# Altium PCB LED_PCB.PcbDoc (part 2 of 4)
Units mil, origin at the board's own origin, x right, y up, seen from the top; angles counter-clockwise.
Board outline 8000 x 4000 mil, 2 copper layers (Top Layer, Bottom Layer); 187 components, 303 nets, 1415 pads, 387 vias.
Unrouted connection lines stored in the file: 1.
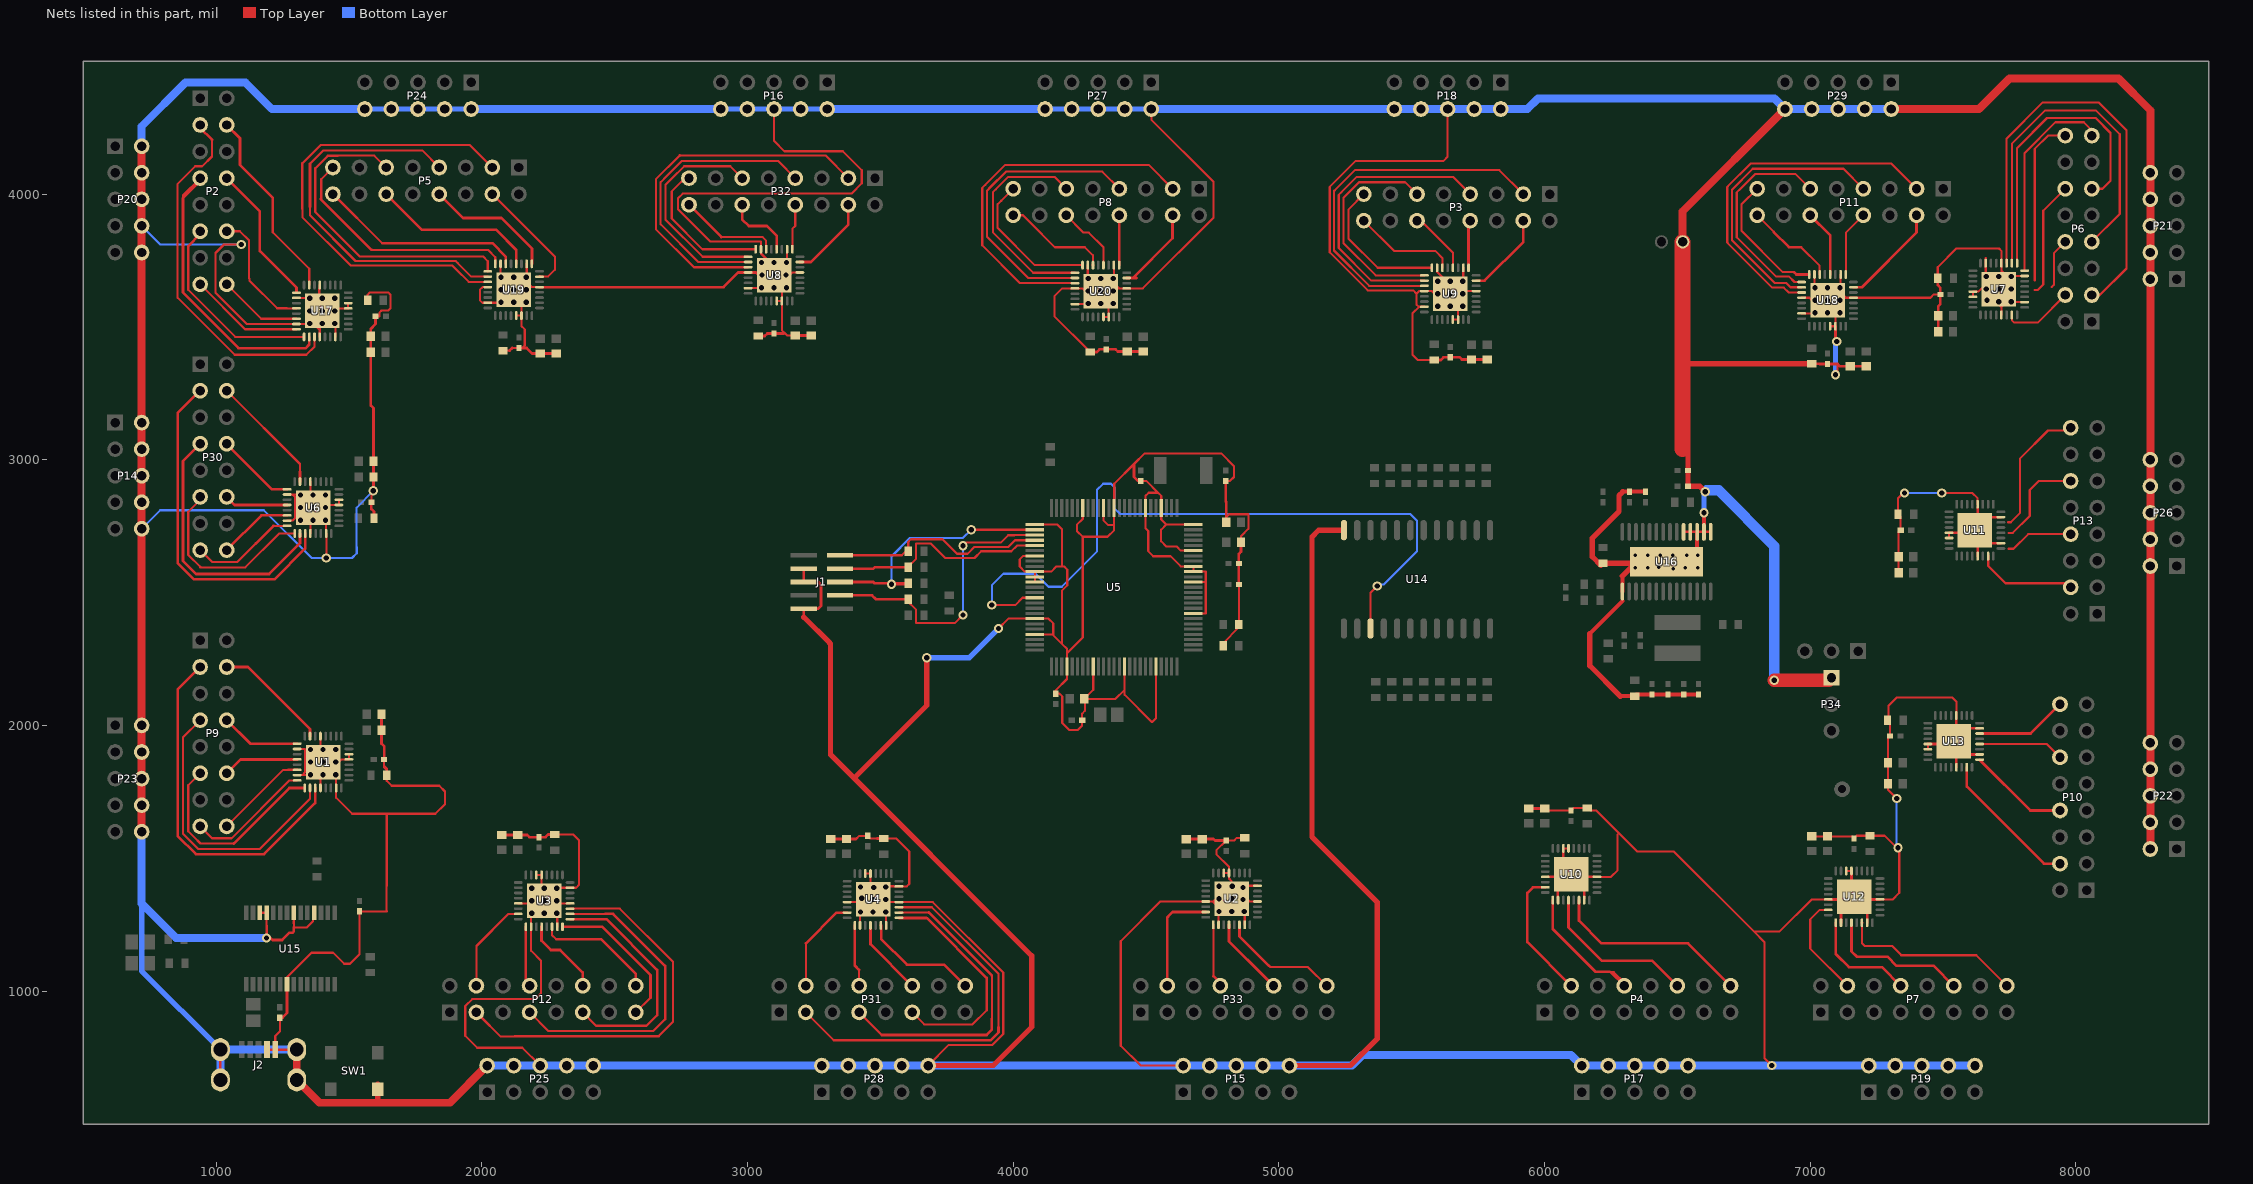
[diagram p2: the nets of this part, all layers, seen from the top]

## Via types
v1: diameter 35, hole 20, Top Layer to Bottom Layer, 371 vias
v2: diameter 25.98, hole 12.99, Top Layer to Bottom Layer, tented top, 12 vias
v3: diameter 89, hole 89, Top Layer to Bottom Layer, 4 vias

## Nets (pads, with @x,y where several pads share a name; then routed paths per layer and width w, separated by ;. In a path a pad name is that pad's centre, name@x,y a point inside that pad or via, vN(x,y) a via of type N, cw(c..) or ccw(c..) an arc to the next point about the centre after c; other vN are vias at no path point) (continued)
GND: C1.1 C2.1 C3.1 C4.1 C5.1 C6.1 C7.1 C8.1 C9.1 C10.1 C11.1 C12.1 C13.1 C14.1 C15.1 C16.1 C17.1 C18.1 C19.1 C20.1 C21.1 C22.1 C23.1 C24.1 C25.1 C26.1 C27.1 C28.1 C29.1 C30.1 C31.1 C32.1 C33.1 C34.1 C35.1 C36.1 C37.1 C38.1 C39.1 C40.1 C41.1 C42.1 C43.1 C44.1 C45.1 C46.1 C47.1 C48.2 C49.2 C50.2 C51.2 C54.1 C55.1 C56.1 C59.1 C60.1 C61.1 C62.1 C63.1 C64.1 C65.1 C66.1 C67.1 C68.1 C69.1 C70.1 C71.1 J1.3 J1.5 J1.9 J2.4 J2.5 J2.6 J2.7 J2.8 J2.9 J3.2 P14.6 P14.7 P14.8 P14.9 P14.10 P15.6 P15.7 P15.8 P15.9 P15.10 P16.6 P16.7 P16.8 P16.9 P16.10 P17.6 P17.7 P17.8 P17.9 P17.10 P18.6 P18.7 P18.8 P18.9 P18.10 P19.6 P19.7 P19.8 P19.9 P19.10 P20.6 P20.7 P20.8 P20.9 P20.10 P21.6 P21.7 P21.8 P21.9 P21.10 P22.6 P22.7 P22.8 P22.9 P22.10 P23.6 P23.7 P23.8 P23.9 P23.10 P24.6 P24.7 P24.8 P24.9 P24.10 P25.6 P25.7 P25.8 P25.9 P25.10 P26.6 P26.7 P26.8 P26.9 P26.10 P27.6 P27.7 P27.8 P27.9 P27.10 P28.6 P28.7 P28.8 P28.9 P28.10 P29.6 P29.7 P29.8 P29.9 P29.10 P34.1 R1.1 R2.1 R3.1 R4.1 R10.1 R11.1 R13.1 R14.1 R15.1 R16.1 R17.1 R18.1 R19.1 R20.1 R42.2 R47.1 R48.1 R49.1 R50.1 R51.1 SW1.4 U1.5 U1.10 U1.15 U1.20 U1.23 U1.29 U1.30 U1.33 U2.5 U2.10 U2.15 U2.20 U2.23 U2.29 U2.30 U2.33 U3.5 U3.10 U3.15 U3.20 U3.23 U3.29 U3.30 U3.33 U4.5 U4.10 U4.15 U4.20 U4.23 U4.29 U4.30 U4.33 U5.4 U5.9 U5.15 U5.21 U5.33 U5.39 U5.41 U5.42 U5.45 U5.50 U5.54 U5.57 U5.63 U5.65 U5.69 U5.76 U5.82 U5.85 U5.86 U5.87 U5.94 U5.97 U6.5 U6.10 U6.15 U6.20 U6.23 U6.29 U6.30 U6.33 U7.5 U7.10 U7.15 U7.20 U7.23 U7.29 U7.30 U7.33 U8.5 U8.10 U8.15 U8.20 U8.23 U8.29 U8.30 U8.33 U9.5 U9.10 U9.15 U9.20 U9.23 U9.29 U9.30 U9.33 U10.5 U10.10 U10.15 U10.20 U10.29 U10.30 U10.33 U11.5 U11.10 U11.15 U11.20 U11.29 U11.30 U11.33 U12.5 U12.10 U12.15 U12.20 U12.29 U12.30 U12.33 U13.5 U13.10 U13.15 U13.20 U13.29 U13.30 U13.33 U14.12 U15.7 U15.18 U15.21 U15.25 U15.26 U16.1 U16.15 U16.16 U16.17 U16.18 U16.19 U16.29 U17.5 U17.10 U17.15 U17.20 U17.23 U17.29 U17.30 U17.33 U18.5 U18.10 U18.15 U18.20 U18.23 U18.29 U18.30 U18.33 U19.5 U19.10 U19.15 U19.20 U19.23 U19.29 U19.30 U19.33 U20.5 U20.10 U20.15 U20.20 U20.23 U20.29 U20.30 U20.33 | length 73037.5
  Top Layer w8: v1(1095,3810) 1030,3810 998,3778 998,3628 1115.21,3510.79 U17.15@1302.56,3510.79 1367.37,3510.79 1390.16,3488 ; 1190.43,1245.57 U15.25@1190.43,1294.45 ; J2.5@1222.99,780 1222.99,831 1240,848.01 C47.1@1240,900.32 ; U15.7@1267.2,1025.55 1267.2,1052.56 1359.14,1144.5 1440.5,1144.5 1482,1103 1504,1103 1540,1139 C46.1@1540,1300.32 1642,1300.32 1642.28,1484.78 ; U6.15@1267.56,2770.79 1288,2770.79 1297,2779.79 1297,2860.21 1288,2869.21 ; U6.10@1267.56,2869.21 1288,2869.21 ; 1276.62,1220 1288,1220 ; 1292.8,1255.48 1292.8,1240 1342.13,1240 1364.64,1262.51 1364.64,1271.64 1369.57,1276.57 U15.18@1369.57,1294.45 ; 1292.8,1263.2 U15.21@1292.8,1294.45 ; U17.10@1302.56,3609.21 U17.33@1360.95,3609.21 ; U1.15@1305.32,1813.03 1324.03,1813.03 ; U1.10@1305.32,1911.46 1335,1911.46 1335,1824 1324.03,1813.03 ; U6.20@1355.16,2722.56 1355.16,2810.16 v1(1365,2820) 1355.16,2829.84 U6.33@1355.16,2873 ; U6.5@1355.16,2917.44 U6.33@1355.16,2873 ; U17.20@1390.16,3462.56 1390.16,3488 ; U17.5@1390.16,3657.44 1386.37,3609.21 U17.33@1360.95,3609.21 ; U1.20@1392.91,1764.8 1392.91,1796.12 ; U1.5@1392.91,1959.68 1392.91,1872.09 v1(1402.76,1862.24) ; v1(1400,3560) U17.33@1390.16,3550.16 ; v1(1415,2630) 1415,2721.77 U6.23@1414.21,2722.56 1414.21,2818.05 1426,2829.84 U6.29@1462.44,2829.84 U6.30@1462.44,2849.53 ; U17.23@1449.21,3462.56 1449.21,3558.05 1461,3569.84 U17.29@1497,3569.84 ; U17.29@1497.44,3569.84 U17.29@1497,3569.84 ; U17.30@1497.44,3589.53 1497,3589.53 U17.29@1497,3569.84 ; U1.30@1500.2,1891.77 U1.29@1500.2,1872.09 1471,1872.09 1461.16,1862.24 v1(1450,1862.24) v1(1402.76,1862.24) ; R49.1@1570.47,3600 1570.47,3621.28 1579.2,3630 1648,3630 1656.37,3621.63 1656.37,3570.22 1648,3561.84 1645.53,3561.84 1622.9,3561.84 1615.88,3554.81 1615.88,3549 ; C25.1@1584.68,2840 1584.68,2875.68 v1(1592,2883) ; C63.1@1600.32,3540 1615.87,3540 1615.87,3549 ; C4.1@1632.44,1872.24 1632.44,1846.84 1632.44,1841.84 1642.28,1832 R2.1@1642.28,1812.24 1642.28,1792 1661.15,1773.14 1840,1773.14 1861.5,1751.64 1861.5,1704 1825,1667.5 1642.28,1667.5 1512.47,1667.5 1451.97,1728 U1.23@1451.97,1764.8 1451.97,1813.03 v1(1402.76,1862.24) ; U19.20@2022.56,3649.84 2002.84,3649.84 1993,3640 1993,3600 2002.21,3590.79 U19.23@2022.56,3590.79 2070.79,3590.79 v1(2072.76,3592.76) ; U19.15@2070.79,3737.44 2070.79,3691.05 2112,3649.84 2120,3649.84 U19.33@2129.84,3649.84 ; R50.1@2080,3410.47 2104,3410.47 2113.84,3420.32 2114.84,3420.32 C66.1@2140,3420.32 2152,3420.32 2162,3430.32 2162,3490.53 2149.53,3503 U19.30@2149.53,3542.56 ; U19.29@2129.84,3542.56 U19.30@2149.53,3542.56 ; U3.5@2137.56,1330.16 2177.91,1330.16 2178,1330.16 2185.79,1322.37 U3.10@2185.79,1242.56 2185.79,1152.21 2223,1115 2223,992 2201,970 1964,970 1938,944 1938,832 1983,787 2153,787 P25.8@2220,720 ; U19.10@2169.21,3737.44 2169.21,3670 2189.37,3649.84 ; U3.30@2205.47,1437.44 U3.29@2225.16,1437.44 2225.16,1349.84 v1(2235,1340) v1(2282.24,1292.76) 2284.21,1290.79 U3.15@2284.21,1242.56 ; U19.5@2217.44,3649.84 2189.37,3649.84 ; R3.1@2275,1589.53 2344.47,1589.53 2366,1568 2366,1400 2355.21,1389.21 U3.23@2332.44,1389.21 2312,1389.21 ; U3.33@2295,1330 2312.16,1330 2312,1330.16 U3.20@2332.44,1330.16 ; U8.23@3002.56,3645.79 3050.79,3645.79 v1(3100,3695) ; 3031,3704.84 3040.84,3695 U8.33@3052.76,3695 ; v1(3055,3695) U8.33@3055,3710 ; U8.33@3055,3697.24 U8.33@3052.76,3695 ; P16.8@3100,4320 3100,4200 3139,4161 3359,4161 3430,4090 3430,4040 3391.53,4001.53 2756,4001.53 2738.47,3984 2738.47,3942.8 2860.1,3821.17 3050.79,3821.17 U8.15@3050.79,3792.44 3050.79,3776.38 3100,3727.17 v1(3100,3695) ; U8.29@3109.84,3597.56 U8.30@3129.53,3597.56 ; 3136,3475.32 3142.21,3475.32 ; v1(3147.24,3742.24) 3149.21,3744.21 U8.10@3149.21,3792.44 ; C26.1@3180,3467.44 3150.09,3467.44 3142.21,3475.32 ; U8.5@3197.44,3704.84 3168.9,3704.84 3147.24,3683.19 U8.33@3129.53,3665.47 ; J1.3@3211.89,2590.39 J1.3@3244.39,2590.39 ; 3310,2309.67 3312.76,2306.92 ; U4.5@3375.32,1335.16 3425.51,1335.16 3462.91,1335.16 v1(3472.76,1345) ; 3408.76,1572.56 3420.57,1584.37 C12.1@3452.76,1584.37 3462.6,1574.53 3487.6,1574.53 ; U4.10@3423.54,1247.56 U4.33@3423.54,1312 ; U4.30@3443.23,1442.44 U4.29@3462.91,1442.44 3462.91,1354.84 v1(3472.76,1345) ; U4.33@3456,1297 3504.97,1297 3521.97,1280 U4.15@3521.97,1247.56 ; R4.1@3512.76,1574.53 3560.47,1574.53 3609.15,1525.85 3609.15,1403.36 3600,1394.21 U4.23@3570.2,1394.21 3551.21,1394.21 3552,1395 U4.33@3535,1395 ; v1@3675,2252.24 v1(3675,2255) ; P28.10@3680,720 3758,798 3922.04,798 3962.66,838.62 3962.66,1069.97 3697.47,1335.16 U4.20@3570.2,1335.16 3520,1335.16 3482.6,1335.16 v1(3472.76,1345) ; v1(3945,2365) 3981.89,2401.89 U5.94@4081.77,2401.89 4133.11,2401.89 4151,2384 4151,2340 ; U5.97@4061.11,2342.38 4061.11,2342.83 U5.97@4081.77,2342.83 4148.17,2342.83 4151,2340 ; U5.87@4081.77,2539.69 U5.86@4081.77,2559.37 U5.85@4081.77,2579.06 ; U5.82@4081.77,2638.11 4038.11,2638.11 4025,2625 4025,2598.19 4044.13,2579.06 U5.85@4081.77,2579.06 ; U5.76@4081.77,2756.22 4111.55,2756.22 4111.55,2755.78 4167.06,2755.78 4183.5,2739.33 4183.5,2600.81 ; U20.23@4232.56,3585.79 4280.79,3585.79 v1(4282.76,3587.76) ; U5.69@4261.89,2818.23 4261.89,2776.89 4240,2755 4240,2731.89 4261.89,2710 ; C20.1@4270,2100 4270,2055 4259.68,2044.68 C21.1@4259.68,2020 4259.68,2000 4242.68,1983 4211,1983 4184.69,2009.31 4184.69,2109.31 4174.32,2119.68 C19.1@4160,2119.68 4160,2132.17 4202.83,2175 U5.4@4202.83,2221.77 4202.83,2272 ; U20.15@4280.79,3732.44 4280.79,3684.21 v1(4330,3635) ; R51.1@4290,3405.47 4155,3540.47 4155,3615 4184.84,3644.84 U20.20@4232.56,3644.84 4261,3644.84 4270.84,3635 v1(4282.76,3635) v1(4330,3635) ; U5.9@4301.26,2221.77 4301.26,2133.7 C20.1@4267.56,2100 4385,2100 4419.37,2134.37 ; U20.29@4339.84,3537.56 U20.30@4359.53,3537.56 4359.53,3591 4330,3591 v1(4330,3635) ; U5.65@4340.63,2818.23 4340.63,2771 4356.63,2755 4380,2755 ; U20.10@4379.21,3732.44 4379.21,3665 4399.37,3644.84 ; 4405,795 4480,720 P15.6@4640,720 ; 4405,1188.4 4554,1337.4 U2.5@4724.8,1337.4 4752,1337.4 ; U5.15@4419.37,2221.77 4419.37,2134.37 ; 4470,2920.32 C18.1@4480,2920.32 4500.85,2920.32 4545.17,2876 ; P27.6@4520,4320 4520,4280 4754,4046 4754,3911 4487.84,3644.84 U20.5@4427.44,3644.84 4399.37,3644.84 ; U5.21@4537.48,2221.77 4537.48,2027.48 4522.5,2012.5 4419.37,2115.63 4419.37,2134.37 ; U5.33@4678.23,2421.57 4725,2421.57 4725,2579.06 U5.41@4678.23,2579.06 U5.42@4678.23,2598.74 4631,2598.74 4592.74,2637 4527.5,2637 4508.5,2656 4508.5,2732 4498.11,2742.39 U5.57@4498.11,2818.23 4498.11,2864 4510.11,2876 4545.17,2876 ; U5.45@4678.23,2657.8 4631.41,2657.8 4615.71,2673.5 4576,2673.5 4556.8,2692.7 4556.8,2737.02 4576,2756.22 ; U5.50@4678.23,2756.22 4576,2756.22 ; U5.39@4685,2539.69 4723.23,2539.69 ; U2.10@4773.03,1249.8 4773.03,1316.37 4752,1337.4 ; R10.1@4790.47,2300 4790.47,2310 4849.53,2369.06 R11.1@4849.53,2380 4849.53,2454 4849.68,2454.16 C13.1@4849.68,2530 ; 4792,1566.93 C1.1@4802.24,1566.93 4832.24,1566.93 4842.09,1576.77 R1.1@4872.24,1576.77 ; U2.30@4792.72,1444.68 U2.29@4812.4,1444.68 ; C17.1@4800,2920.32 4816,2920.32 4831,2935.32 4831,2976 4783,3024 4495,3024 4455,2984 4380.5,2909.5 4380.5,2831.68 4380,2831.68 U5.63@4380,2818.23 4380,2755 ; C1.1@4801.93,1566.93 4765,1530 4765,1515 4812.4,1467.6 U2.29@4812.4,1444.68 ; C15.1@4802.44,2765 4802.44,2784 4813.16,2794.72 4885.31,2794.72 4885.31,2740.31 4857.56,2712.56 C16.1@4857.56,2690 ; U2.33@4869.49,1396.46 U2.23@4919.69,1396.46 ; U2.15@4871.46,1249.8 4871.46,1298.03 v1(4822.24,1347.24) ; U2.20@4919.69,1337.4 4891,1337.4 4881.16,1347.24 4869.49,1347.24 v1(4822.24,1347.24) ; U9.23@5547.56,3575.79 5528,3575.79 ; R16.1@5585,3375.47 5523,3375.47 5502.5,3395.97 5502.5,3550.29 5528,3575.79 ; U9.15@5595.79,3722.44 5595.79,3706.38 5645,3657.17 v1(5645,3625) ; P18.8@5635,4320 5635,4140 5620,4125 5290,4125 5190,4025 5191.47,4023.53 5191.47,3780.84 5334.71,3637.61 5505.24,3637.61 5518,3624.84 ; U9.29@5654.84,3527.56 U9.30@5674.53,3527.56 5674.53,3581 5645,3581 v1(5645,3625) ; v1(5692.24,3672.24) 5694.21,3674.21 U9.10@5694.21,3722.44 ; U9.5@5742.44,3634.84 5692.24,3634.84 5654.84,3634.84 v1(5645,3625) ; C36.1@6000,1687.56 6007.87,1679.69 C37.1@6100,1679.69 6109.84,1689.53 R18.1@6160,1689.53 ; U10.30@6070.47,1537.44 U10.29@6090.16,1537.44 ; R18.1@6162.18,1691.71 6173.89,1680 6195,1680 6349.18,1525.82 6486.81,1525.82 6788.81,1223.81 ; U10.20@6197.44,1430.16 6250.16,1430.16 6275,1455 6275,1589.95 6280.02,1594.98 ; R42.2@6212.26,2602.74 R42.2@6219.53,2610 ; 6292.8,2467.8 U16.1@6292.8,2504.17 U16.1@6292.8,2505 ; 6317.4,2616.38 6341.02,2616.38 U16.29@6459.13,2616.38 6547.72,2616.38 U16.29@6574.29,2642.95 ; U16.29@6322.76,2592.76 v2(6341.02,2592.76) ; R47.1@6340,2110.47 R47.1@6346.22,2116.69 ; 6520,3365 6524.06,3360.94 ; J3.2@6520,3820 J3.2@6532,3808 ; U16.29@6523.11,2616.38 U16.29@6523.11,2646.89 ; v1@6599.88,2799.88 v1(6600,2800) ; v1(6855,720) 6828,747 6828,1184.63 6788.81,1223.81 ; U18.23@6967.56,3550.79 7015.79,3550.79 v1(7017.76,3552.76) ; U18.20@6967.56,3609.84 6996,3609.84 7005.84,3600 v1(7017.76,3600) v1(7065,3600) ; C38.1@7005,1582.56 C39.1@7065,1582.56 7157.13,1582.56 C40.1@7165,1574.69 7175,1584.69 7175,1585 R19.1@7224.53,1585 ; U18.15@7015.79,3697.44 7015.79,3649.21 v1(7065,3600) ; U12.5@7067.56,1345.16 7005.16,1345.16 6883.81,1223.81 6788.81,1223.81 ; P34.1@7070,2170 P34.1@7080,2180 ; U18.29@7074.84,3502.56 U18.30@7094.53,3502.56 7094.53,3556 7065,3556 v1(7065,3600) ; v1(7095,3320) 7103,3328 7103,3360.32 ; U18.10@7114.21,3697.44 7114.21,3630 7134.37,3609.84 ; U12.30@7135.47,1452.44 U12.29@7155.16,1452.44 ; R19.1@7225,1584.53 R19.1@7224.53,1585 ; U12.20@7262.44,1345.16 7309.84,1345.16 7310,1345 7335,1370 7335,1530 7280,1585 R19.1@7224.53,1585 ; v1(7325,1725) 7292.44,1757.56 C44.1@7292.44,1780 C43.1@7292.44,1860 7292.44,1952.13 C45.1@7300.32,1960 7300.32,2010.16 R20.1@7290.47,2020 7295,2024.53 7295,2075 7325,2105 7535,2105 7549.84,2090.16 U13.20@7549.84,2037.44 ; C41.1@7325,2567.56 C41.1@7332.44,2575 C42.1@7332.44,2635 7332.44,2727.13 C34.1@7340.32,2735 7340.32,2785.16 R17.1@7330.47,2795 7330.47,2855.47 v1@7350,2875 ; U13.30@7442.56,1910.47 U13.29@7442.56,1930.16 ; R13.1@7480,3682.44 7480,3725 7550,3795 7710.37,3795 7719.37,3786 U7.20@7719.37,3739.88 7719.37,3712 ; C22.1@7490.59,3622.44 C22.1@7489.84,3622.44 7465,3622.44 7452.4,3609.84 U18.5@7162.44,3609.84 7134.37,3609.84 ; v1(7495,2875) 7495.31,2874.69 7609.69,2874.69 7629.84,2854.53 U11.20@7629.84,2832.44 ; U11.30@7522.56,2705.47 U11.29@7522.56,2725.16 ; U7.30@7612.09,3612.91 U7.29@7612.09,3632.6 7632,3632.6 7660.32,3660.91 U7.23@7660.32,3739.88 7660.32,3760 ; U7.5@7719.37,3545 7719.37,3574 ; U7.10@7806.97,3593.23 7738.6,3593.23 7719.37,3574 ; U7.15@7806.97,3691.65 7739.72,3691.65 7719.37,3712 ; P22.10@8280,1935 P22.10@8280,1960 ; 1288,2869.21 1351.37,2869.21 U6.33@1355.16,2873 ; 1324.03,1813.03 1376,1813.03 1392.91,1796.12 ; U17.33@1360.95,3609.21 1390.16,3580 1390.16,3560 U17.33@1390.16,3550.16 ; 1390.16,3488 U17.33@1390.16,3550.16 ; 1392.91,1796.12 1392.91,1815 1392.91,1852.4 v1(1402.76,1862.24) ; U19.33@2129.84,3649.84 2189.37,3649.84 ; U19.33@2129.84,3649.84 v1(2120,3640) 2120,3596 2149.53,3596 U19.30@2149.53,3542.56 ; U8.33@3052.76,3695 v1(3100,3695) ; v1(3100,3695) U8.33@3129.53,3665.47 ; U8.30@3129.53,3597.56 3129.53,3488 3142.21,3475.32 ; U8.30@3129.53,3597.56 U8.33@3129.53,3665.47 ; U5.85@4081.77,2579.06 4142.75,2579.06 4161.78,2598.09 4192,2598.09 4203.5,2586.59 4203.5,2527.09 4183.5,2507.09 4183.5,2307.5 ; 4151,2340 4183.5,2307.5 ; 4183.5,2307.5 4202.83,2288.17 4202.83,2272 ; 4202.83,2272 4261.89,2331.06 4261.89,2710 ; 4261.89,2710 4355,2710 4380,2735 4380,2755 ; v1(4330,3635) 4365,3635 4365,3644.84 4377.24,3644.84 4399.37,3644.84 ; 4545.17,2876 4557.17,2864 U5.54@4557.17,2818.23 4557.17,2775.05 4576,2756.22 ; 4752,1337.4 4754,1337.4 4763.84,1347.24 v1(4775,1347.24) v1(4822.24,1347.24) ; U2.29@4812.4,1444.68 4812.4,1423.84 4822.24,1414 v1(4822.24,1347.24) ; 5518,3624.84 5528,3634.84 U9.20@5547.56,3634.84 5576,3634.84 5585.84,3625 v1(5597.76,3625) v1(5645,3625) ; 5518,3624.84 5518,3584 5526.21,3575.79 5528,3575.79 ; v1(7065,3600) 7100,3600 7100,3609.84 7112.24,3609.84 7134.37,3609.84 ; 7719.37,3574 7709.53,3583.84 v1(7709.53,3595.2) v1(7709.53,3642.44) 7719.37,3652.28 7719.37,3712
  Top Layer w10: J2.7@1016.3,665.83 J2.6@1016.3,780 ; U15.26@1164.84,1294.45 U15.25@1190.43,1294.45 ; 1190.43,1245.57 1190.43,1214.57 1212.52,1192.48 1249.09,1192.48 1276.62,1220 ; J2.4@1191.5,780 J2.5@1222.99,780 J2.9@1303.7,780 ; C47.1@1240,900.32 1250,900.32 1267.2,917.52 U15.7@1267.2,1025.55 ; 1288,1220 1292.8,1224.8 1292.8,1240 ; 1292.8,1255.48 1292.8,1263.2 ; v1(1317.76,2772.76) v1(1317.76,2820) ; v1(1352.76,3512.76) v1(1352.76,3560) ; v1(1352.76,3607.24) v1(1352.76,3560) ; v1(1365,2820) v1(1365,2867.24) ; U1.33@1392.91,1852.4 v1(1355.51,1815) 1392.91,1815 v1(1402.76,1815) ; v1(1400,3560) 1390.16,3560 v1(1352.76,3560) ; v1(1412.24,2772.76) v1(1412.24,2820) v1(1412.24,2867.24) ; v1(1450,1862.24) v1(1450,1909.49) ; P24.10@1560,4320 P24.10@1570,4310 ; C25.1@1584.68,2840 1584.68,2814.84 1594.53,2805 R14.1@1594.53,2780 ; v1@1584.68,2875.68 1584.68,2883 1592.56,2890.87 C23.1@1592.56,2935 C24.1@1592.56,2995 1592.56,3194 1582.44,3204.12 C62.1@1582.44,3405 C61.1@1582.44,3465 1582.44,3493 1600.32,3510.87 C63.1@1600.32,3540 ; C3.1@1622.76,2042.24 C2.1@1622.76,1982.24 1622.76,1931.68 1632.44,1922 C4.1@1632.44,1872.24 ; 1632.44,1846.84 1642.28,1837 1642.28,1832 ; 1642,1300.32 1642.28,1300.6 ; 1642.28,1484.78 1642.28,1667.5 ; v1(2072.76,3592.76) v1(2072.76,3640) v1(2072.76,3687.24) ; C6.1@2075,1587.56 C5.1@2135,1587.56 2171,1587.56 2178.87,1579.68 C7.1@2215,1579.68 2240,1579.68 2249.84,1589.53 R3.1@2275,1589.53 ; 2104,3410.47 2105,3410.47 2114.84,3420.32 ; v1(2120,3640) 2120,3649.84 v1(2120,3687.24) ; 2152,3420.32 2169,3420.32 2189.32,3400 C65.1@2220,3400 C64.1@2280,3400 ; v1(2167.24,3592.76) v1(2167.24,3640) ; U3.33@2177.91,1330.16 v1(2187.76,1340) ; v1(2187.76,1292.76) v1(2187.76,1340) ; v1(2187.76,1387.24) v1(2187.76,1340) ; U19.5@2217.44,3649.84 2909.84,3649.84 2964.84,3704.84 U8.20@3002.56,3704.84 3031,3704.84 ; U3.29@2225,1437.6 U3.29@2225.16,1437.44 ; v1(2235,1292.76) v1(2235,1340) ; v1(2282.24,1292.76) v1(2282.24,1340) v1(2282.24,1387.24) 2284.21,1389.21 2312,1389.21 ; R15.1@3040,3465.47 3065,3465.47 3074.84,3475.32 C28.1@3100,3475.32 3136,3475.32 ; v1(3052.76,3647.76) U8.33@3052.76,3695 ; v1(3145,3695) U8.33@3145,3710 ; U8.33@3145,3697.24 U8.33@3147.24,3695 ; v1(3147.24,3647.76) 3147.24,3683.19 U8.33@3147.24,3695 ; v1(3147.24,3742.24) U8.33@3147.24,3695 ; C26.1@3180,3467.44 C27.1@3240,3467.44 ; J1.9@3211,2439.21 J1.9@3211.89,2439.21 ; 3211.89,2407.78 J1.9@3211.89,2439.21 ; J1.3@3211.89,2590.39 J1.5@3211.89,2540 3267,2540 3277,2530 3277,2450 3266.21,2439.21 J1.9@3211.89,2439.21 ; C11.1@3312.76,1572.56 C10.1@3372.76,1572.56 3408.76,1572.56 ; v1(3425.51,1297.76) 3425.51,1335.16 U4.33@3425.51,1345 ; v1(3425.51,1392.24) U4.33@3462.91,1354.84 ; v1(3430,1350) 3430.51,1350 3472.76,1392.24 v1(3472.76,1345) v1(3472.76,1297.76) ; 3487.6,1574.53 R4.1@3512.76,1574.53 ; v1(3520,1297.76) 3520,1335.16 v1(3520,1345) v1(3520,1392.24) ; v1(4282.76,3587.76) v1(4282.76,3635) ; R51.1@4290,3405.47 4315,3405.47 4324.84,3415.32 C71.1@4350,3415.32 4386,3415.32 4393.87,3407.44 C69.1@4430,3407.44 C70.1@4490,3407.44 ; v1(4330,3587.76) U20.33@4330,3591 ; v1(4330,3635) v1(4330,3682.24) ; v1(4377.24,3587.76) v1(4377.24,3635) 4377.24,3644.84 v1(4377.24,3682.24) ; 4405,795 4405,1188.4 ; 4455,2984 4455,2935.32 4470,2920.32 ; C9.1@4652.24,1572.36 C8.1@4712.24,1572.36 4754.24,1572.36 4759.68,1566.93 C1.1@4801.93,1566.93 ; v1(4775,1300) v1(4775,1347.24) 4775,1394.49 U2.33@4775.51,1395 ; C17.1@4800,2920.32 4800,2843.44 4802.44,2841 4802.44,2784 ; C15.1@4802.44,2754.12 C15.1@4802.44,2765 ; C13.1@4849.68,2530 C14.1@4849.68,2610 4849.68,2646 4857.56,2653.87 C16.1@4857.56,2690 C16.1@4857.56,2699 ; U2.33@4869.49,1347.24 4869.49,1394.49 4870,1393.98 U2.33@4870,1355 ; U14.12@5245,2715 U14.12@5245,2735.04 ; R16.1@5585,3375.47 5610,3375.47 5619.84,3385.32 C33.1@5645,3385.32 5681,3385.32 5688.87,3377.44 C32.1@5725,3377.44 C31.1@5785,3377.44 ; v1(5597.76,3577.76) v1(5597.76,3625) ; v1(5645,3577.76) U9.33@5645,3581 ; v1(5692.24,3577.76) v1(5692.24,3625) 5692.24,3634.84 v1(5692.24,3672.24) ; C35.1@5940,1687.56 C36.1@6000,1687.56 ; U10.5@6015,1430 U10.33@6050,1430 ; U10.10@6050,1355 U10.33@6050,1390 ; U10.33@6070.47,1490.47 U10.30@6070.47,1537.44 ; U10.33@6145,1430 U10.20@6185,1430 ; U10.15@6150,1350 U10.33@6150,1390 ; U16.29@6323.78,2610 v2(6341.02,2592.76) 6341.02,2616.38 v2(6341.02,2640) ; U16.29@6523.11,2616.38 U16.29@6530,2616.38 ; U16.29@6523.11,2646.89 U16.29@6530,2640 ; U16.19@6523.11,2728.58 U16.18@6548.7,2728.58 U16.17@6574.29,2728.58 U16.16@6599.88,2728.58 U16.15@6625.47,2728.58 ; C56.1@6524.13,2116.69 C56.1@6531,2116.69 ; v2(6530,2592.76) U16.29@6530,2616.38 ; v2(6535,2640) U16.29@6530,2640 ; v2(6577.24,2592.76) v2(6577.24,2640) ; R48.1@7005,3360.94 7034,3360.94 7034.63,3360.32 C60.1@7065,3360.32 7103,3360.32 7110.87,3352.44 C68.1@7150,3352.44 C67.1@7210,3352.44 ; v1(7017.76,3552.76) v1(7017.76,3600) ; v1(7065,3552.76) U18.33@7065,3556 ; U12.5@7067.56,1345.16 U12.33@7114.84,1345.16 ; v1(7112.24,3552.76) v1(7112.24,3600) 7112.24,3609.84 v1(7112.24,3647.24) ; U12.10@7115.79,1257.56 U12.33@7115.79,1305.79 ; U12.33@7155.16,1415.16 U12.29@7155.16,1452.44 ; U12.15@7214.21,1257.56 U12.33@7214.21,1295.79 ; U12.33@7220.16,1345.16 U12.20@7262.44,1345.16 ; U13.29@7442.56,1930.16 U13.33@7494.84,1930.16 ; R13.1@7480,3682.44 7480,3656.84 7489.84,3647 C22.1@7489.84,3622.44 7489.84,3585.87 7481.97,3578 C29.1@7481.97,3542.44 C30.1@7481.97,3482.44 ; U11.29@7522.56,2725.16 U11.33@7559.84,2725.16 ; U13.5@7549.84,1842.56 7549.84,1874.84 ; U13.33@7549.84,1985.16 U13.20@7549.84,2037.44 ; U13.33@7589.21,1890.79 U13.10@7637.44,1890.79 ; U13.33@7589.21,1989.21 U13.15@7637.44,1989.21 ; U11.5@7629.84,2637.56 U11.33@7629.84,2679.84 ; U11.33@7630,2795 U11.20@7630,2820 ; v1(7662.28,3689.68) v1(7662.28,3642.44) 7662.28,3595.2 7665,3597.91 v1(7665,3600) ; U11.33@7680.79,2685.79 U11.10@7717.44,2685.79 ; U11.33@7680.79,2784.21 U11.15@7717.44,2784.21 ; v1(7709.53,3642.44) v1(7709.53,3689.68) ; v1(7756.77,3595.2) v1(7756.77,3642.44) v1(7756.77,3689.68) ; P22.10@8260,1940 P22.10@8280,1960 ; U16.29@6530,2616.38 U16.29@6530,2640
  Top Layer w12: v1@7094.53,3450.47 U18.30@7094.53,3502.56
  Top Layer w15: 6170,2345 6292.8,2467.8 ; 6284.53,2110.47 R47.1@6340,2110.47 ; U16.1@6292.8,2504.17 6292.8,2562.8 ; 6294.69,2879.69 C50.2@6320,2879.69 C51.2@6380,2879.69 ; R47.1@6346.22,2116.69 C54.1@6404.13,2116.69 C55.1@6464.13,2116.69 C56.1@6524.13,2116.69 ; C56.1@6531,2116.69 C59.1@6579.13,2116.69 ; U16.29@6574.29,2642.95 U16.17@6574.29,2728.58 ; U16.16@6599.88,2728.58 v1@6599.88,2799.88
  Top Layer w20: 1608.58,580 SW1.4@1608.58,650 ; 3211.89,2407.78 3310,2309.67 ; 3312.76,2306.92 3312.76,1890 4070,1132.76 4070,865 3925,720 P28.10@3680,720 ; 3401.38,1801.38 3675,2075 v1@3675,2252.24 ; P15.10@5040,720 5270,720 5370,820 5370,1335 5125,1580 5125,2710 5150.04,2735.04 U14.12@5245,2735.04 ; 6170,2345 6170,2225 6284.53,2110.47 ; R42.2@6212.26,2602.74 6180,2635 6180,2705 6280,2805 6280,2865 6294.69,2879.69 ; R42.2@6219.53,2610 U16.29@6323.78,2610 ; 6292.8,2562.8 U16.29@6322.76,2592.76 ; 6524.06,3360.94 R48.1@7005,3360.94 ; 6539.69,3125 C49.2@6539.69,2960 C48.2@6539.69,2900 6585,2900 v1(6605,2880)
  Top Layer w30: P23.10@720,1600 P23.9@720,1700 P23.8@720,1800 P23.7@720,1900 P23.6@720,2000 P14.10@720,2740 P14.9@720,2840 P14.8@720,2940 P14.7@720,3040 P14.6@720,3140 P20.10@720,3780 P20.9@720,3880 P20.8@720,3980 P20.7@720,4080 P20.6@720,4180 ; J2.9@1303.7,780 J2.8@1303.7,665.83 1389.53,580 1880,580 P25.6@2020,720 ; J3.2@6520,3820 6520,3935 P29.10@6905,4320 ; P29.6@7305,4320 7635,4320 7750,4435 8160,4435 8280,4315 P21.10@8280,4080 P21.9@8280,3980 P21.8@8280,3880 P21.7@8280,3780 P21.6@8280,3680 P26.10@8280,3000 P26.9@8280,2900 P26.8@8280,2800 P26.7@8280,2700 P26.6@8280,2600 P22.10@8280,1960 ; P22.6@8280,1535 P22.7@8280,1635 P22.8@8280,1735 P22.9@8280,1835 P22.10@8280,1935
  Top Layer w50: v1(6865,2170) P34.1@7070,2170
  Top Layer w60: 6520,3039.69 6520,3365 J3.2@6520,3820
  Bottom Layer w8: P14.10@720,2740 790,2810 1180,2810 1359.5,2630.5 1414.5,2630.5 v1(1415,2630) 1511.72,2630 1529.5,2647.78 1529.5,2672.22 1529,2672.72 1529,2820 v1(1592,2883) ; P20.9@720,3880 790,3810 v1(1095,3810) ; 6520,3768 J3.2@6520,3820 ; v1@6600,2875 v1(6605,2880) v1@6610,2885 ; v1@7095,3440 v1(7100,3445) ; v1(7325,1725) 7325,1545 v1(7330,1540) ; v1(7355,2875) v1(7495,2875)
  Bottom Layer w20: 720,1330 720,1076.3 J2.6@1016.3,780 ; P24.10@1560,4320 P24.9@1660,4320 P24.8@1760,4320 P24.7@1860,4320 P24.6@1960,4320 ; P16.10@2900,4320 P16.9@3000,4320 P16.8@3100,4320 P16.7@3200,4320 P16.6@3300,4320 ; v1(3675,2255) 3835,2255 v1(3945,2365) ; P27.10@4120,4320 P27.9@4220,4320 P27.8@4320,4320 P27.7@4420,4320 P27.6@4520,4320 ; v1(6600,2800) v1@6600,2875 ; v1(7095,3320) v1@7095,3440
  Bottom Layer w30: P23.10@720,1600 720,1330 850,1200 v1(1190,1200) ; P20.6@720,4180 720,4255 885,4420 1110,4420 1210,4320 P24.10@1560,4320 ; J2.7@1016.3,665.83 J2.6@1016.3,780 J2.9@1303.7,780 ; P24.6@1960,4320 P16.10@2900,4320 ; P25.6@2020,720 P25.7@2120,720 P25.8@2220,720 P25.9@2320,720 P25.10@2420,720 P28.6@3280,720 P28.7@3380,720 P28.8@3480,720 P28.9@3580,720 P28.10@3680,720 P15.6@4640,720 P15.7@4740,720 P15.8@4840,720 P15.9@4940,720 P15.10@5040,720 5275,720 5315,760 6100,760 P17.6@6140,720 P17.7@6240,720 P17.8@6340,720 P17.9@6440,720 P17.10@6540,720 v1(6855,720) P19.6@7220,720 P19.7@7320,720 P19.8@7420,720 P19.9@7520,720 P19.10@7620,720 ; P16.6@3300,4320 P27.10@4120,4320 ; P27.6@4520,4320 P18.10@5435,4320 P18.9@5535,4320 P18.8@5635,4320 P18.7@5735,4320 5935,4320 5975,4360 6865,4360 P29.10@6905,4320 P29.9@7005,4320 P29.8@7105,4320 P29.7@7205,4320 P29.6@7305,4320
  Bottom Layer w40: v1@6610,2885 6655,2885 6865,2675 v1(6865,2170)
  other v1: 4822.24,1300 4869.49,1300 4865,1345 2187.76,1387.24 2235,1387.24 2282.24,1387.24 3475,1390 4865,1390 4775,1395 4825,1395 1450,1815 1355.51,1862.24 1355.51,1909.49 1402.76,1909.49 1365,2772.76 1317.76,2867.24 1400,3512.76 1447.24,3512.76 1447.24,3560 2120,3592.76 1400,3607.24 1447.24,3607.24 7017.76,3647.24 7065,3647.24 3100,3647.76 5597.76,3672.24 5645,3672.24 4282.76,3682.24 2167.24,3687.24 3052.76,3742.24 3100,3742.24
  other v2: 6485,2590 6388.27,2592.76 6430,2595 6388.27,2640 6435.51,2640 6482.76,2640
INHIBIT: U5.90 U14.15 | length 2775.2
  Top Layer w8: v1(3920,2453) 4007.37,2453 4035,2480.63 U5.90@4081.77,2480.63 ; U14.15@5345,2364.96 5345,2500 v1(5369.91,2524.91)
  Bottom Layer w8: v1(3920,2453) 3920,2528 3963,2571 4083.91,2571 4133,2521.91 4182.91,2521.91 4315,2654 4315,2886 4338.5,2909.5 4368,2909.5 4381,2896.5 4381,2818 4403,2796 5494,2796 5520,2770 5520,2656 5394,2530 5375,2530 v1(5369.91,2524.91)
JTAG_TCK: J1.4 R6.1 U5.80 | length 850
  Top Layer w8: R6.1@3605.47,2595 3605.47,2598 3635,2627.53 3635,2684.72 3690,2684.72 3744.34,2630.38 3854.5,2630.38 3879.68,2655.56 3992.89,2655.56 4014.81,2677.48 U5.80@4081.77,2677.48
  Top Layer w10: J1.4@3348.11,2590.39 3474,2590.39 3478.61,2595 R6.1@3605.47,2595
JTAG_TDI: J1.8 R8.1 U5.78 | length 1219.6
  Top Layer w8: J1.8@3348.11,2489.61 3469,2489.61 ; R8.1@3600.24,2469.76 3635,2435 3635,2385.28 3780.28,2385.28 v1(3811,2416) ; v1(3811,2676) 3823,2688 3953,2688 3981,2716 4005.15,2716 4006,2716.85 U5.78@4081.77,2716.85
  Top Layer w10: J1.8@3348.11,2489.61 3469,2489.61 3483.61,2475 R8.1@3605.47,2475
  Bottom Layer w8: v1(3811,2416) v1(3811,2676)
JTAG_TDO: J1.6 R7.1 U5.77 | length 1013.3
  Top Layer w8: v1(3542,2531) 3605.47,2531 R7.1@3605.47,2535 ; v1(3841.91,2736.54) U5.77@4081.77,2736.54
  Top Layer w10: J1.6@3348.11,2540 3474,2540 3479,2535 3542,2535 R7.1@3605.47,2535
  Bottom Layer w8: v1(3542,2531) 3542,2636 3611.5,2705.5 3810.87,2705.5 v1(3841.91,2736.54)
JTAG_TMS: J1.2 R5.1 U5.79 | length 817.7
  Top Layer w8: J1.2@3348.11,2640.79 3580.79,2640.79 3605,2665 3605,2689.28 3604.28,2690 3615,2700.72 3734.33,2700.72 3788.67,2646.38 3828.88,2646.38 3854.06,2671.56 3981.36,2671.56 4006.97,2697.17 U5.79@4081.77,2697.17
LED_BLUE_0: P2.4 U17.7 | length 932
  Top Layer w8: P2.4@1040,4260 1090,4210 ; 1213.99,3986.01 1213.99,3856.01 1350.79,3719.21 U17.7@1350.79,3657.44
  Top Layer w10: P2.4@1040,4260 1090,4210 1090,4110 1213.99,3986.01 1213.99,3856.01
LED_BLUE_1: P2.8 U17.9 | length 539.9
  Top Layer w10: P2.8@1040,4060 1165,3935 1165,3785 1302.56,3647.44 U17.9@1302.56,3628.9
LED_BLUE_2: P2.12 U17.12 | length 506.1
  Top Layer w8: P2.12@1040,3860 1089.77,3860 1124.5,3825.27 1124.5,3797.78 1124,3797.28 1124,3683.37 1125.53,3681.84 1125.53,3674.47 1230,3570 1230.16,3569.84 1265.16,3569.84 U17.12@1302.56,3569.84
  Top Layer w10: 1230,3570 1265,3570 1265.16,3569.84
LED_BLUE_3: P2.16 U17.14 | length 316.2
  Top Layer w8: P2.16@1040,3660 1169.53,3530.47 U17.14@1302.56,3530.47
LED_BLUE_4: P5.4 U19.7 | length 455
  Top Layer w8: P5.4@2040,4000 2275,3765 2275,3715 2250,3690 2249.21,3689.21 U19.7@2217.44,3689.21
  Top Layer w10: P5.4@2040,4000 P5.4@2043.28,4000 ; U19.7@2217.44,3689.21 U19.7@2218.23,3690
LED_BLUE_5: P5.8 U19.9 | length 634.7
  Top Layer w10: P5.8@1840,4000 1930,3910 ; 2073.28,3910 1930,3910 ; U19.9@2188.9,3737.44 2188.9,3795 2073.9,3910 1930,3910
LED_BLUE_6: P5.12 U19.12 | length 629.5
  Top Layer w10: P5.12@1640,4000 1775,3865 2055,3865 2129.84,3790.16 U19.12@2129.84,3737.44
LED_BLUE_7: P5.16 U19.14 | length 802.2
  Top Layer w8: P5.16@1440,4000 1625,3815 2039.69,3815 ; U19.14@2090.47,3737.44 2090.47,3764.53
  Top Layer w10: 2039.69,3815 2090.16,3764.53 2090.47,3764.53 U19.14@2090.47,3737.44
LED_BLUE_8: P8.4 U20.7 | length 468.3
  Top Layer w8: U20.7@4427.44,3684.21 4451.06,3684.21 4600,3833.15 P8.4@4600,3920
  Top Layer w10: 4451.06,3684.21 U20.7@4427.44,3684.21 4464.21,3684.21 ; 4600,3833.15 P8.4@4600,3920
LED_BLUE_9: P8.8 U20.9 | length 188
  Top Layer w10: U20.9@4398.9,3732.44 4398.9,3918.9 P8.8@4400,3920
LED_BLUE_10: P8.12 U20.12 | length 257.2
  Top Layer w8: P8.12@4200,3920 4265,3855 4285,3855 4339.84,3800.16 U20.12@4339.84,3732.44
LED_BLUE_11: P8.16 U20.14 | length 400.6
  Top Layer w8: P8.16@4000,3920 4037.03,3920 4061.56,3895.47 4157.03,3800 4270,3800 4300,3770 4300.47,3769.53 U20.14@4300.47,3732.44
  Top Layer w10: U20.14@4300,3732.91 U20.14@4300.47,3732.44
LED_BLUE_12: P11.4 U18.7 | length 387.8
  Top Layer w10: U18.7@7162.44,3649.21 7194.21,3649.21 7400,3855 P11.4@7400,3920
LED_BLUE_13: P11.8 U18.9 | length 249.9
  Top Layer w8: U18.9@7133.9,3697.44 7133.9,3853.9 P11.8@7200,3920
LED_BLUE_14: P11.12 U18.12 | length 253.6
  Top Layer w10: P11.12@7000,3920 7074.84,3845.16 U18.12@7074.84,3697.44
LED_BLUE_15: P11.16 U18.14 | length 346.5
  Top Layer w8: P11.16@6800,3920 6862.1,3857.9 ; 6965,3800 7035.47,3729.53 U18.14@7035.47,3697.44
  Top Layer w10: 6862.1,3857.9 6920,3800 6965,3800
LED_BLUE_16: P30.4 U6.7 | length 493.6
  Top Layer w8: P30.4@1040,3260 1315.79,2984.21 1315.79,2954.21 U6.7@1315.79,2917.44
  Top Layer w10: U6.7@1315.79,2917.44 1315.79,2954.21
LED_BLUE_17: P30.8 U6.9 | length 298.4
  Top Layer w10: P30.8@1040,3060 1211.1,2888.9 U6.9@1267.56,2888.9
LED_BLUE_18: P30.12 U6.12 | length 240.1
  Top Layer w10: P30.12@1040,2860 1070.16,2829.84 U6.12@1267.56,2829.84
LED_BLUE_19: P30.16 U6.14 | length 281.6
  Top Layer w10: P30.16@1040,2660 1170.47,2790.47 U6.14@1267.56,2790.47
LED_BLUE_20: P32.4 U8.7 | length 315.9
  Top Layer w10: U8.7@3197.44,3744.21 3239.21,3744.21 3380,3885 P32.4@3380,3960
LED_BLUE_21: P32.8 U8.9 | length 172.2
  Top Layer w8: U8.9@3168.9,3792.44 3168.9,3868.9 3180,3880 P32.8@3180,3960
LED_BLUE_22: P32.12 U8.12 | length 312.3
  Top Layer w8: U8.12@3109.84,3792.44 3109.84,3843.44
  Top Layer w10: P32.12@2980,3960 2980,3905 3005,3880 3073.28,3880 3109.84,3843.44 U8.12@3109.84,3792.44
LED_BLUE_23: P32.16 U8.14 | length 551
  Top Layer w8: P32.16@2780,3960 2901.82,3838.18 3056.82,3838.18 3060,3835 3070.47,3824.53 U8.14@3070.47,3792.44
  Top Layer w10: P32.16@2780,3960 2901.82,3838.18
LED_BLUE_24: P3.4 U9.7 | length 317.9
  Top Layer w10: U9.7@5742.44,3674.21 5774.21,3674.21 5920,3820 P3.4@5920,3900
LED_BLUE_25: P3.8 U9.9 | length 180.1
  Top Layer w10: U9.9@5713.9,3722.44 5713.9,3893.9 P3.8@5720,3900
LED_BLUE_26: P3.12 U9.12 | length 242.2
  Top Layer w8: P3.12@5520,3900 5535,3900 5654.84,3780.16 U9.12@5654.84,3722.44
LED_BLUE_27: P3.16 U9.14 | length 390.7
  Top Layer w8: P3.16@5320,3900 5435,3785 5590,3785 5615.47,3759.53 U9.14@5615.47,3722.44
LED_BLUE_28: P6.4 U7.7 | length 267.9
  Top Layer w8: U7.7@7758.74,3545 7758.74,3525.26 7768,3516 7856,3516 P6.4@7960,3620
LED_BLUE_29: P6.8 | length 192.8
  Top Layer w8: 7909,3650.36 7917,3658.36 7917,3777 ; 7917,3775 7917,3777 ; P6.8@7960,3820 7917,3777
LED_BLUE_30: P6.12 | length 450.3
  Top Layer w8: P6.12@7960,4020 7877,3937 7877,3659.37 7856.63,3639 ; 7856.63,3639 7843.37,3639 7856.63,3639
LED_BLUE_31: P6.16 | length 630.7
  Top Layer w8: 7845,3675 7845,4170 7895,4220 P6.16@7960,4220
LED_BLUE_32: P9.4 U1.7 | length 437.1
  Top Layer w10: P9.4@1040,2220 1120,2220 1353.54,1986.46 U1.7@1353.54,1959.68
LED_BLUE_33: P9.8 U1.9 | length 302.1
  Top Layer w10: P9.8@1040,2020 1128.86,1931.14 U1.9@1305.32,1931.14
LED_BLUE_34: P9.12 U1.12 | length 286.9
  Top Layer w10: P9.12@1040,1820 1092.09,1872.09 U1.12@1305.32,1872.09
LED_BLUE_35: P9.16 U1.14 | length 406
  Top Layer w8: P9.16@1040,1620 1252.72,1832.72 1272.72,1832.72 U1.14@1305.32,1832.72
  Top Layer w10: P9.16@1040,1620 P9.16@1060,1620 ; 1272.72,1832.72 U1.14@1305.32,1832.72
LED_BLUE_36: P12.4 U3.7 | length 357.6
  Top Layer w8: P12.4@1980,1020 1980,1170 2100.79,1290.79 U3.7@2137.56,1290.79
LED_BLUE_37: P12.8 U3.9 | length 228.3
  Top Layer w10: U3.9@2166.1,1242.56 2166.1,1033.9 P12.8@2180,1020
LED_BLUE_38: P12.12 U3.12 | length 307.2
  Top Layer w10: U3.12@2225.16,1242.56 2225.16,1189.84 2260,1155 2295,1155 2380,1070 P12.12@2380,1020
LED_BLUE_39: P12.16 U3.14 | length 577.8
  Top Layer w8: U3.14@2264.53,1242.56 2264.53,1210.47 2280,1195 2405,1195
  Top Layer w10: 2280,1195 2405,1195 2450,1195 2580,1065 P12.16@2580,1020
LED_BLUE_40: P31.4 U4.7 | length 566.4
  Top Layer w8: P31.4@3220,1020 3220,1180 3335.47,1295.47 3335.79,1295.79 U4.7@3375.32,1295.79
  Top Layer w10: 3220,1180 3335.47,1295.47 U4.7@3375.32,1295.47
LED_BLUE_41: P31.8 U4.9 | length 408.6
  Top Layer w8: U4.9@3403.86,1247.56 3403.86,1096.14 3420,1080 P31.8@3420,1020
  Top Layer w10: U4.9@3403.62,1247.56 3403.62,1096.38 3403.86,1096.14 3420,1080
LED_BLUE_42: P31.12 U4.12 | length 292.8
  Top Layer w10: U4.12@3462.91,1247.56 3463.23,1247.56 3463.23,1176.77 P31.12@3620,1020
LED_BLUE_43: P31.16 U4.14 | length 441.7
  Top Layer w10: U4.14@3502.28,1247.56 3503.23,1247.56 3503.23,1196.77 3600,1100 3740,1100 P31.16@3820,1020
LED_BLUE_44: P33.4 U2.7 | length 410.8
  Top Layer w10: P33.4@4580,1020 4580,1277.72 4588.65,1286.37 4600,1297.72 U2.7@4724.8,1297.72
LED_BLUE_45: P33.8 U2.9 | length 230.8
  Top Layer w8: 4753.35,1056.65 U2.9@4753.35,1249.8
  Top Layer w10: 4753.35,1056.65 P33.8@4780,1030
LED_BLUE_46: P33.12 U2.12 | length 410.8
  Top Layer w8: 4812.4,1187.6 U2.12@4812.4,1249.8 ; 4945.07,1054.93 P33.12@4980,1020
  Top Layer w10: U2.12@4812.4,1249.8 4812.4,1187.6 4945.07,1054.93 P33.12@4980,1020
LED_BLUE_47: P33.16 U2.14 | length 492.3
  Top Layer w8: 4851.77,1206.2 U2.14@4851.77,1249.8 ; 4963.28,1095 4967.36,1090.93 5109.07,1090.93 P33.16@5180,1020
  Top Layer w10: U2.14@4852.09,1249.8 4852.09,1206.2 4963.28,1095
LED_BLUE_48: P4.4 U10.7 | length 494.5
  Top Layer w10: U10.7@6002.56,1390.79 5955.79,1390.79 5935,1370 5935,1185 P4.4@6100,1020
LED_BLUE_49: P4.8 U10.9 | length 870
  Top Layer w8: U10.9@6031.1,1342.56 6031.1,1233.9 6031.1,1232 6190.1,1073 6192,1073 6247,1073 6250,1070 P4.8@6300,1020
  Top Layer w10: U10.9@6031.1,1342.56 6031.1,1233.9 6192,1073 ; 6250,1070 6260,1070 P4.8@6300,1030
LED_BLUE_50: P4.12 U10.12 | length 603.6
  Top Layer w10: U10.12@6090.16,1342.56 6090.16,1239.84 6215,1115 6405,1115 P4.12@6500,1020
LED_BLUE_51: P4.16 U10.14 | length 749.2
  Top Layer w10: U10.14@6129.53,1342.56 6129.53,1265.47 6215,1180 6540,1180 P4.16@6700,1020
LED_BLUE_52: P7.4 U12.7 | length 390.4
  Top Layer w8: U12.7@7067.56,1305.79 7035.79,1305.79 7000,1270 7000,1160 P7.4@7140,1020
LED_BLUE_53: P7.8 U12.9 | length 411.8
  Top Layer w10: U12.9@7096.1,1257.56 7096.1,1138.9 7145,1090 7270,1090 P7.8@7340,1020
LED_BLUE_54: P7.12 U12.12 | length 546.3
  Top Layer w10: U12.12@7155.16,1257.56 7155.16,1149.84 7175,1130 7290,1130 7325,1095 7465,1095 P7.12@7540,1020
LED_BLUE_55: P7.16 U12.14 | length 689.7
  Top Layer w8: U12.14@7194.53,1257.56 7194.53,1180.47 7205,1170 7308.28,1170 7343.28,1135 ; 7625,1135 P7.16@7740,1020
  Top Layer w10: U12.14@7194.53,1257.56 U12.14@7195,1257.09 ; 7343.28,1135 7625,1135
LED_BLUE_56: P10.4 U13.7 | length 543.2
  Top Layer w10: U13.7@7589.21,1842.56 7589.53,1842.56 7589.53,1770.47 7880,1480 P10.4@7940,1480
LED_BLUE_57: P10.8 U13.9 | length 381.9
  Top Layer w10: U13.9@7637.44,1871.1 7637.44,1870.87 7828.31,1680 P10.8@7940,1680
LED_BLUE_58: P10.12 U13.12 | length 323.3
  Top Layer w8: U13.12@7637.44,1930.16 7679.84,1930.16 7889.84,1930.16 P10.12@7940,1880
LED_BLUE_59: P10.16 U13.14 | length 348.3
  Top Layer w10: U13.14@7637.44,1969.53 7829.53,1969.53 P10.16@7940,2080
LED_BLUE_60: P13.4 U11.7 | length 418.1
  Top Layer w8: U11.7@7669.21,2637.56 7669.21,2600.79 7735,2535 7965,2535 P13.4@7980,2520
  Top Layer w10: 7669.53,2600.47 U11.7@7669.53,2637.56
LED_BLUE_61: P13.8 | length 256.6
  Top Layer w8: 7746.17,2665 7765,2665 7820,2720 P13.8@7980,2720
LED_BLUE_62: P13.12 | length 371.8
  Top Layer w8: 7746.17,2725 7762.63,2725 7826,2788.37 7826,2886 7860,2920 P13.12@7980,2920
LED_BLUE_63: P13.16 | length 502.1
  Top Layer w8: 7745,2765 7755,2765 7790,2800 7790,3005 7895,3110 7970,3110 P13.16@7980,3120
LED_GREEN_0: P2.3 U17.19 | length 1391.1
  Top Layer w8: 984.53,4204.53 984.53,4141.56 947.5,4104.53 921.56,4104.53 855.47,4038.44 855.47,3609.53 1070,3395 1340,3395 1370.47,3425.47 U17.19@1370.47,3462.56
  Top Layer w10: P2.3@940,4260 940,4249.06 984.53,4204.53
LED_GREEN_1: P2.7 U17.18 | length 1789
  Top Layer w8: P2.7@940,4060 875.47,3995.47 875.47,3984.53 875.47,3629.53 1071.98,3433.02 ; 1350.79,3433.02 U17.18@1350.79,3462.56
  Top Layer w10: P2.7@940,4060 940,4049.06 875.47,3984.53 875.47,3629.53 1071.98,3433.02 1084.21,3420.79 ; 1084.21,3420 1337.77,3420 1350.79,3433.02
LED_GREEN_2: P2.11 U17.17 | length 912.8
  Top Layer w8: 895.47,3804.53 895.47,3639.53 1072.44,3462.56 U17.17@1331.1,3462.56
  Top Layer w10: 895.47,3639.53 895.47,3804.53 940,3849.06 P2.11@940,3860
LED_GREEN_3: P2.15 U17.16 | length 432.5
  Top Layer w8: P2.15@940,3660 1108.9,3491.1 U17.16@1302.56,3491.1
LED_GREEN_4: P5.3 U19.19 | length 1949.1
  Top Layer w8: U19.19@2022.56,3669.53 1950.47,3669.53 1902.07,3717.93 1889,3731 1539,3731 1507.29,3731 1325,3913.29 1325,3945 1325,4115 1394.53,4184.53 1955.47,4184.53 P5.3@2040,4100
  Top Layer w10: 1325,3945 1325,4115
LED_GREEN_5: P5.7 U19.18 | length 1654.7
  Top Layer w8: P5.7@1840,4100 1775.47,4164.53 1404.53,4164.53 1353.44,4113.44 1353.44,3951.56 1353.44,3919.59 1525.03,3748 1557,3748 1902,3748 1910,3740 1960.79,3689.21 U19.18@2022.56,3689.21
  Top Layer w10: 1353.44,3951.56 1353.44,4113.44
LED_GREEN_6: P5.11 U19.17 | length 1404.9
  Top Layer w8: P5.11@1640,4100 1595.47,4144.53 1458.44,4144.53 1421.56,4144.53 1373.44,4096.42 1373.44,3961.56 1373.44,3932.57 1541.02,3765 1570,3765 2005,3765 2022.56,3747.44 U19.17@2022.56,3708.9
  Top Layer w10: 1373.44,3961.56 1373.44,4096.42 ; 1421.56,4144.53 1458.44,4144.53
LED_GREEN_7: P5.15 U19.16 | length 1279.5
  Top Layer w8: P5.15@1440,4100 1395.47,4055.47 1395.47,3979.53 1585,3790 2023.69,3790 2051.1,3762.58 U19.16@2051.1,3737.44
  Top Layer w10: 1393.44,3981.56 1395.47,3979.53 1585,3790 ; 1395.47,3981.56 1395.47,4055.47 ; U19.16@2051.1,3737.44 2051.1,3762.58
LED_GREEN_8: P8.3 U20.19 | length 1413.9
  Top Layer w8: U20.19@4232.56,3664.53 4100.47,3664.53 4025.8,3664.53 3883.66,3806.67 3883.66,4023.2 3895,4034.54 3970.46,4110 4510,4110 P8.3@4600,4020
LED_GREEN_9: P8.7 U20.18 | length 1123.2
  Top Layer w8: U20.18@4232.56,3684.21 4115.79,3684.21 4057.3,3684.21 3901.66,3839.86 3901.66,4012.91 3915,4026.26 3973.27,4084.53 4335.47,4084.53 P8.7@4400,4020
LED_GREEN_10: P8.11 U20.17 | length 841.6
  Top Layer w8: P8.11@4200,4020 4155.47,4064.53 3981.56,4064.53 3935,4017.97 3923.47,4006.44 3923.47,3856 4075.57,3703.9 4124.85,3703.9 U20.17@4232.56,3703.9
LED_GREEN_11: P8.15 U20.16 | length 549.7
  Top Layer w8: P8.15@4000,4020 3955,3975 3941.47,3961.47 3941.47,3872 4081.03,3732.44 4187.44,3732.44 U20.16@4261.1,3732.44
LED_GREEN_12: P11.3 U18.19 | length 1355.8
  Top Layer w8: U18.19@6967.56,3629.53 6919.02,3629.53 6900.55,3648 6857,3648 6690,3815 6687.47,3817.53 6687.47,4027.01 6690,4029.54 6775.46,4115 7305,4115 P11.3@7400,4020
LED_GREEN_13: P11.7 U18.18 | length 1084.4
  Top Layer w8: U18.18@6967.56,3649.21 6925.79,3649.21 6910,3665 6865.94,3665 6705.47,3825.47 6705.47,4016.73 6783.74,4095 7125,4095 P11.7@7200,4020
LED_GREEN_14: P11.11 U18.17 | length 810.7
  Top Layer w8: U18.17@6967.56,3668.9 6940.55,3668.9 6919.45,3690 6870.7,3690 6723.47,3837.22 6723.47,4006.44 6735.47,4018.44 6792.03,4075 6945,4075 P11.11@7000,4020
LED_GREEN_15: P11.15 U18.16 | length 547.3
  Top Layer w8: P11.15@6800,4020 6741.47,3961.47 6741.47,3861.47 6896.95,3706 6939,3706 ; 6965.11,3697.44 U18.16@6996.1,3697.44
  Top Layer w10: P11.15@6800,4009.06 P11.15@6800,4020 ; 6939,3706 6947.56,3697.44 6965.11,3697.44 U18.16@6996.1,3697.44
LED_GREEN_16: P30.3 U6.19 | length 1294.1
  Top Layer w10: P30.3@940,3260 855.47,3175.47 855.47,2611.24 916.72,2550 1220,2550 1335.47,2665.47 U6.19@1335.47,2722.56
LED_GREEN_17: P30.7 U6.18 | length 1012.8
  Top Layer w10: P30.7@940,3060 875.47,2995.47 875.47,2619.53 925,2570 1200,2570 1315.79,2685.79 U6.18@1315.79,2722.56
LED_GREEN_18: P30.11 U6.17 | length 713.7
  Top Layer w8: P30.11@940,2860 940,2849.06 895.47,2804.53 895.47,2641.56 940,2597.03 942.03,2595 1110,2595 1237.56,2722.56 U6.17@1296.1,2722.56
  Top Layer w10: 940,2597.03 940,2595 942.03,2595
LED_GREEN_19: P30.15 U6.16 | length 402.2
  Top Layer w8: P30.15@940,2660 984.53,2615.47 1080.47,2615.47 1150,2685 ; 1216.1,2751.1 U6.16@1267.56,2751.1
  Top Layer w10: 1150,2685 1216.1,2751.1
LED_GREEN_20: P32.3 U8.19 | length 1391.6
  Top Layer w8: U8.19@3002.56,3724.53 2867.65,3724.53 2798.74,3724.53 2655.2,3868.07 2655.2,4055.2 2745,4145 3295,4145 P32.3@3380,4060
  Top Layer w10: 2745,4144.54 2745,4145
LED_GREEN_21: P32.7 U8.18 | length 1113.2
  Top Layer w8: U8.18@3002.56,3744.21 2876.25,3744.21 2815.06,3744.21 2673.2,3886.07 2673.2,4044.46 2695.47,4066.73 2753.27,4124.53 3115.47,4124.53 P32.7@3180,4060
LED_GREEN_22: P32.11 U8.17 | length 835.9
  Top Layer w8: P32.11@2980,4060 2935.47,4104.53 2761.56,4104.53 2715.47,4058.44 2691.2,4034.18 2691.2,3904.07 2831.37,3763.9 2884.85,3763.9 U8.17@3002.56,3763.9
LED_GREEN_23: P32.15 U8.16 | length 583.9
  Top Layer w8: P32.15@2780,4075 2715,4010 2715,3907.94 2830.5,3792.44 U8.16@3031.1,3792.44
  Top Layer w10: P32.15@2780,4049.06 P32.15@2780,4075
LED_GREEN_24: P3.3 U9.19 | length 1401.5
  Top Layer w8: U9.19@5547.56,3654.53 5370.47,3654.53 5340.42,3654.53 5207.47,3787.47 5207.47,4011.54 5215.47,4019.54 5285.93,4090 5830,4090 P3.3@5920,4000
LED_GREEN_25: P3.7 U9.18 | length 1122.2
  Top Layer w8: U9.18@5547.56,3674.21 5400.79,3674.21 5347.93,3674.21 5225.47,3796.67 5225.47,3996.73 5235.47,4006.73 5293.27,4064.53 5655.47,4064.53 P3.7@5720,4000
LED_GREEN_26: P3.11 U9.17 | length 844.9
  Top Layer w8: P3.11@5520,4000 5475.47,4044.53 5301.56,4044.53 5255.47,3998.44 5243.47,3986.44 5243.47,3814.67 5364.24,3693.9 5421.1,3693.9 U9.17@5547.56,3693.9
LED_GREEN_27: P3.15 U9.16 | length 562.8
  Top Layer w8: P3.15@5320,4000 5261.47,3941.47 5261.47,3832.67 5371.7,3722.44 5427.56,3722.44 U9.16@5576.1,3722.44
  Top Layer w10: P3.15@5320,3989.06 P3.15@5320,4000
LED_GREEN_28: P6.3 U7.19 | length 1711.3
  Top Layer w8: U7.19@7739.06,3739.88 7739.06,4209.06 7875,4345 8085,4345 8190,4240 8190,3720 8090,3620 P6.3@8060,3620
LED_GREEN_29: P6.7 U7.18 | length 1398.9
  Top Layer w8: U7.18@7758.74,3739.88 7758.74,4015 ; 7758.74,4020.74 7758.74,4015 ; P6.7@8060,3820 8165,3925 8165,4225 8075,4315 7885,4315 7758.74,4188.74 7758.74,4015
LED_GREEN_30: P6.11 U7.17 | length 1123.4
  Top Layer w8: U7.17@7778.43,3739.88 7778.43,3930 ; 7778.43,3936 7778.43,3930 ; P6.11@8060,4020 8100,4020 8130,4050 8130,4230 8074,4286 7891,4286 7778.43,4173.43 7778.43,3930
LED_GREEN_31: P6.15 U7.16 | length 776.5
  Top Layer w8: U7.16@7806.97,3711.34 7806.97,4154.6 7922.37,4270 8030,4270 8060,4240 P6.15@8060,4220
LED_GREEN_32: P9.3 U1.19 | length 1353.6
  Top Layer w10: P9.3@940,2220 855.47,2135.47 855.47,1583.99 923.99,1515.47 1180.47,1515.47 1373.23,1708.23 U1.19@1373.23,1764.8
LED_GREEN_33: P9.7 U1.18 | length 1086.2
  Top Layer w8: P9.7@940,2020 875.47,1955.47 875.47,1944.53 875.47,1592.27 932.27,1535.47 1165.47,1535.47 1353.54,1723.54 U1.18@1353.54,1764.8
  Top Layer w10: P9.7@940,2009.06 P9.7@940,2020
LED_GREEN_34: P9.11 U1.17 | length 779.7
  Top Layer w8: 915.51,1581.51 895.47,1601.56 895.47,1775.47 P9.11@940,1820 ; 916.51,1580.51 941.56,1555.47 1066.73,1555.47
  Top Layer w10: 1066.73,1555.47 1276.06,1764.8 U1.17@1333.86,1764.8
LED_GREEN_35: P9.15 U1.16 | length 474
  Top Layer w8: P9.15@940,1620 984.53,1575.47 1021.56,1575.47 1058.44,1575.47 1276.32,1793.35 U1.16@1305.32,1793.35
LED_GREEN_36: P12.3 U3.19 | length 2106.4
  Top Layer w8: P12.3@1980,920 2030,870 2070,830 2125,830 2665,830 2720,885 2720,1110 2519.53,1310.47 U3.19@2332.44,1310.47
  Top Layer w10: P12.3@1980,920 2030,870 ; 2125,830 2665,830
LED_GREEN_37: P12.7 U3.18 | length 1368.1
  Top Layer w8: P12.7@2180,920 2250,850 2645,850 2690,895 2690,1066.8 ; U3.18@2332.44,1290.79 2466.01,1290.79
  Top Layer w10: 2466.01,1290.79 2494.21,1290.79 2690,1095 2690,1066.8 2690,895
LED_GREEN_38: P12.11 U3.17 | length 1146.7
  Top Layer w8: U3.17@2332.44,1271.1 2442,1271.1 ; P12.11@2380,920 2430,870 2620,870 2660,910 2660,1053.1
  Top Layer w10: U3.17@2332.44,1271.1 2442,1271.1 2468.9,1271.1 2660,1080 2660,1053.1 2660,910
LED_GREEN_39: P12.15 U3.16 | length 763
  Top Layer w8: U3.16@2303.9,1242.56 2432.44,1242.56 ; P12.15@2580,920 2635,975 2635,1040
  Top Layer w10: U3.16@2303.9,1242.56 2432.44,1242.56 2452.44,1242.56 2635,1060 2635,1040 2635,975
LED_GREEN_40: P31.3 U4.19 | length 1485
  Top Layer w8: P31.3@3220,920 3325,815 3330,815 ; U4.19@3570.2,1315.47 3570.51,1315.79 3694.21,1315.79 3945,1065 3945,864
  Top Layer w10: 3325,815 3915,815 3945,845 3945,864 ; U4.19@3570.2,1315.79 U4.19@3570.51,1315.79
LED_GREEN_41: P31.7 U4.18 | length 1530.8
  Top Layer w8: P31.7@3420,920 3505,835 ; U4.18@3570.2,1295.79 3682.5,1295.79 3920,1058.28 3920,896
  Top Layer w10: 3505,835 3900,835 3920,855 3920,896 ; 3682.5,1295.79 3920,1058.28
LED_GREEN_42: P31.11 U4.17 | length 1410.2
  Top Layer w8: U4.17@3570.2,1276.1 3673.9,1276.1 3675,1275 3900,1050 3900,928 3847,875 3665,875 P31.11@3620,920
  Top Layer w10: U4.17@3571.06,1275 3675,1275 3900,1050 3900,928